# Altium PCB MK2B.PcbDoc
Units mm, origin at the board's own origin, x right, y up, seen from the top; angles counter-clockwise.
Board outline 214 x 214 mm, 2 copper layers (Top Layer, Bottom Layer); 10 components, 2 nets, 24 pads, 0 vias.
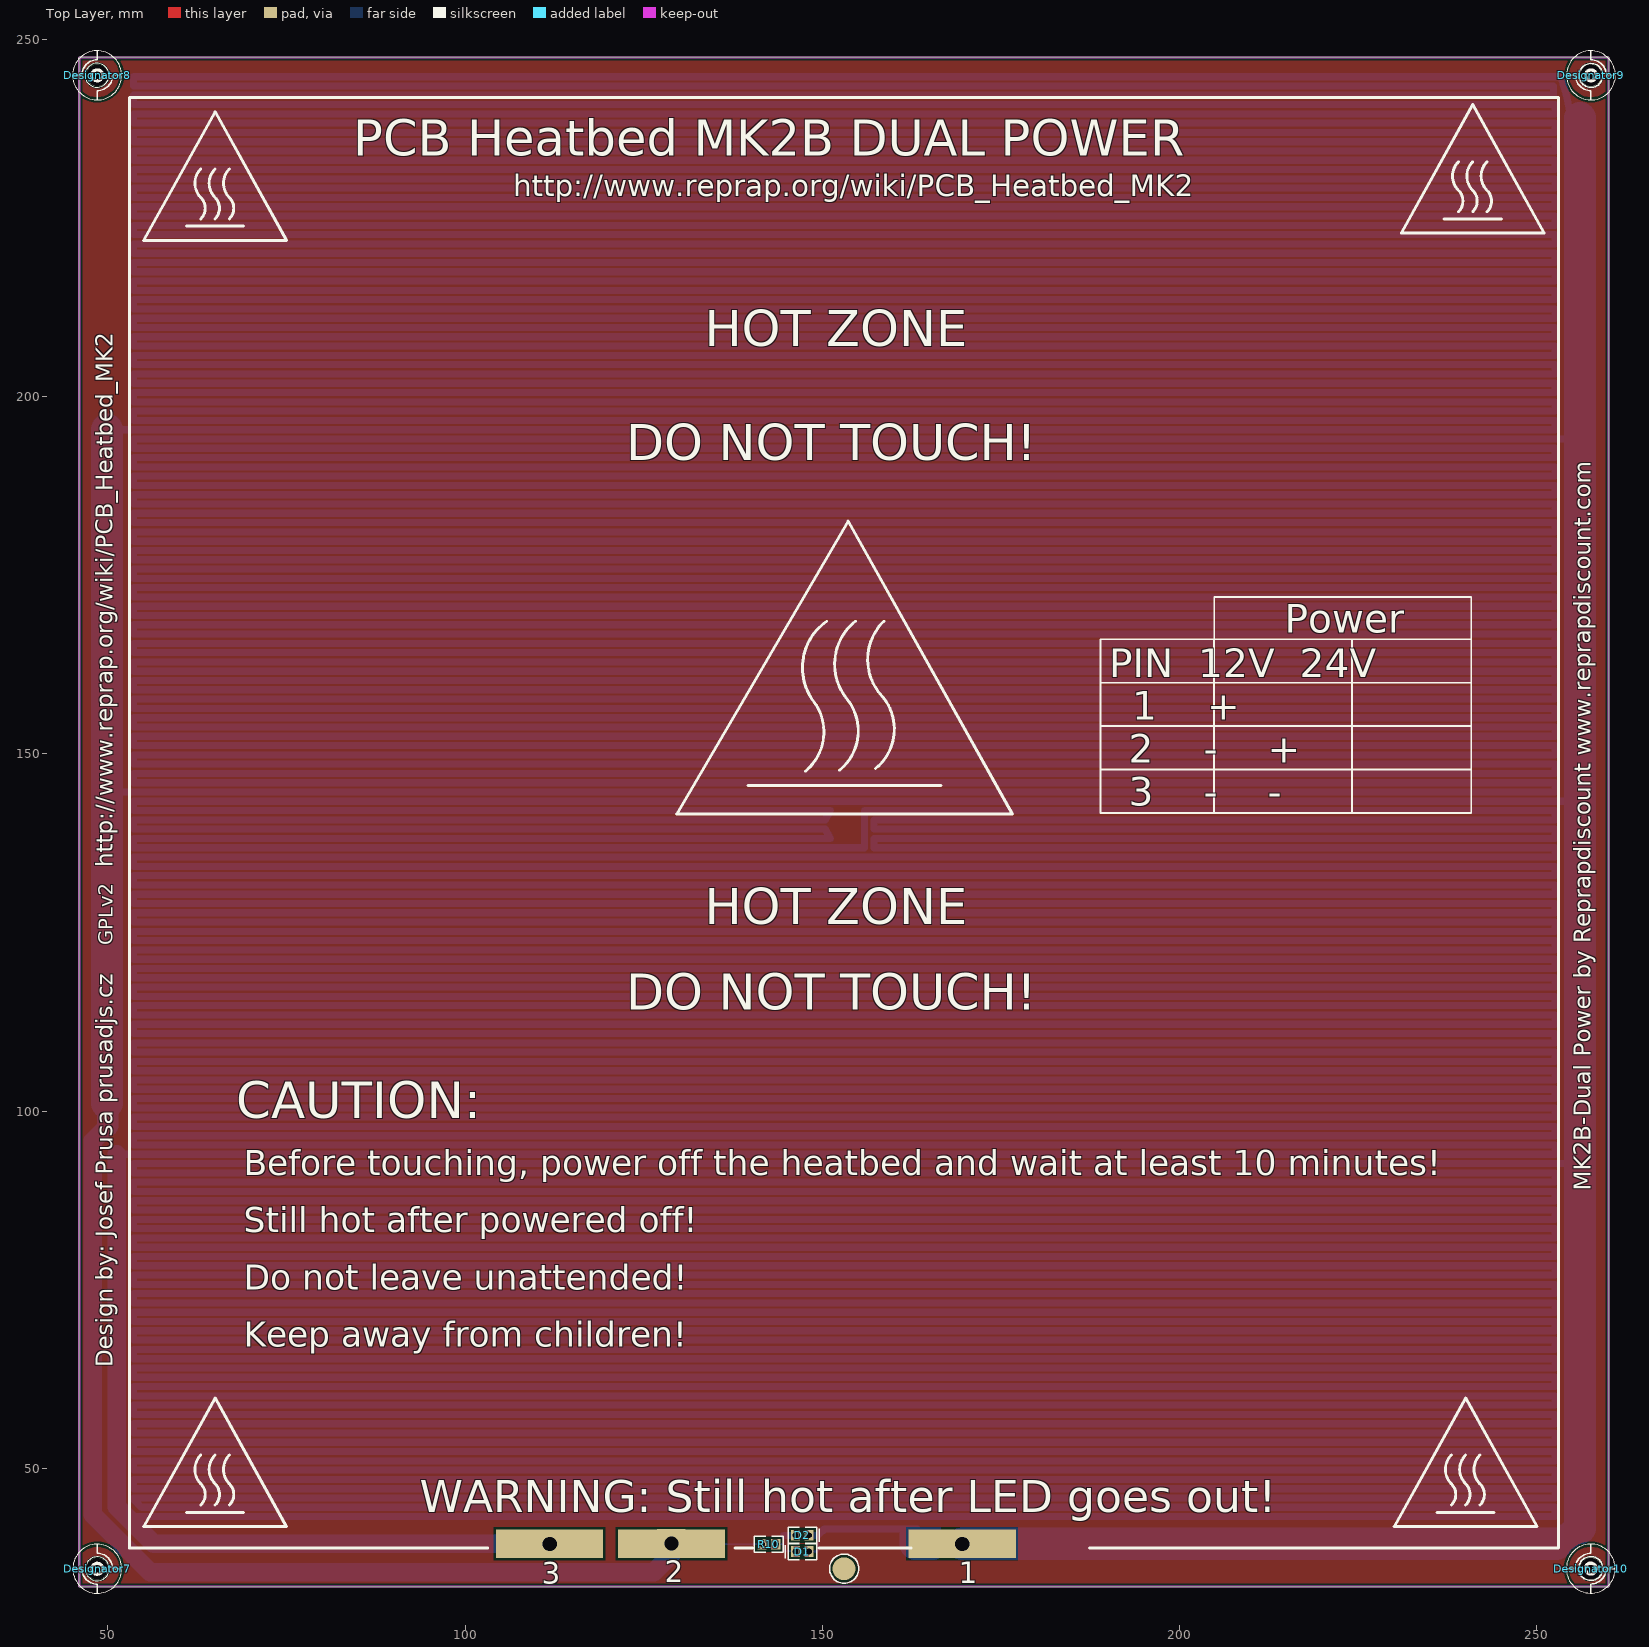
[diagram p0: Top Layer view]
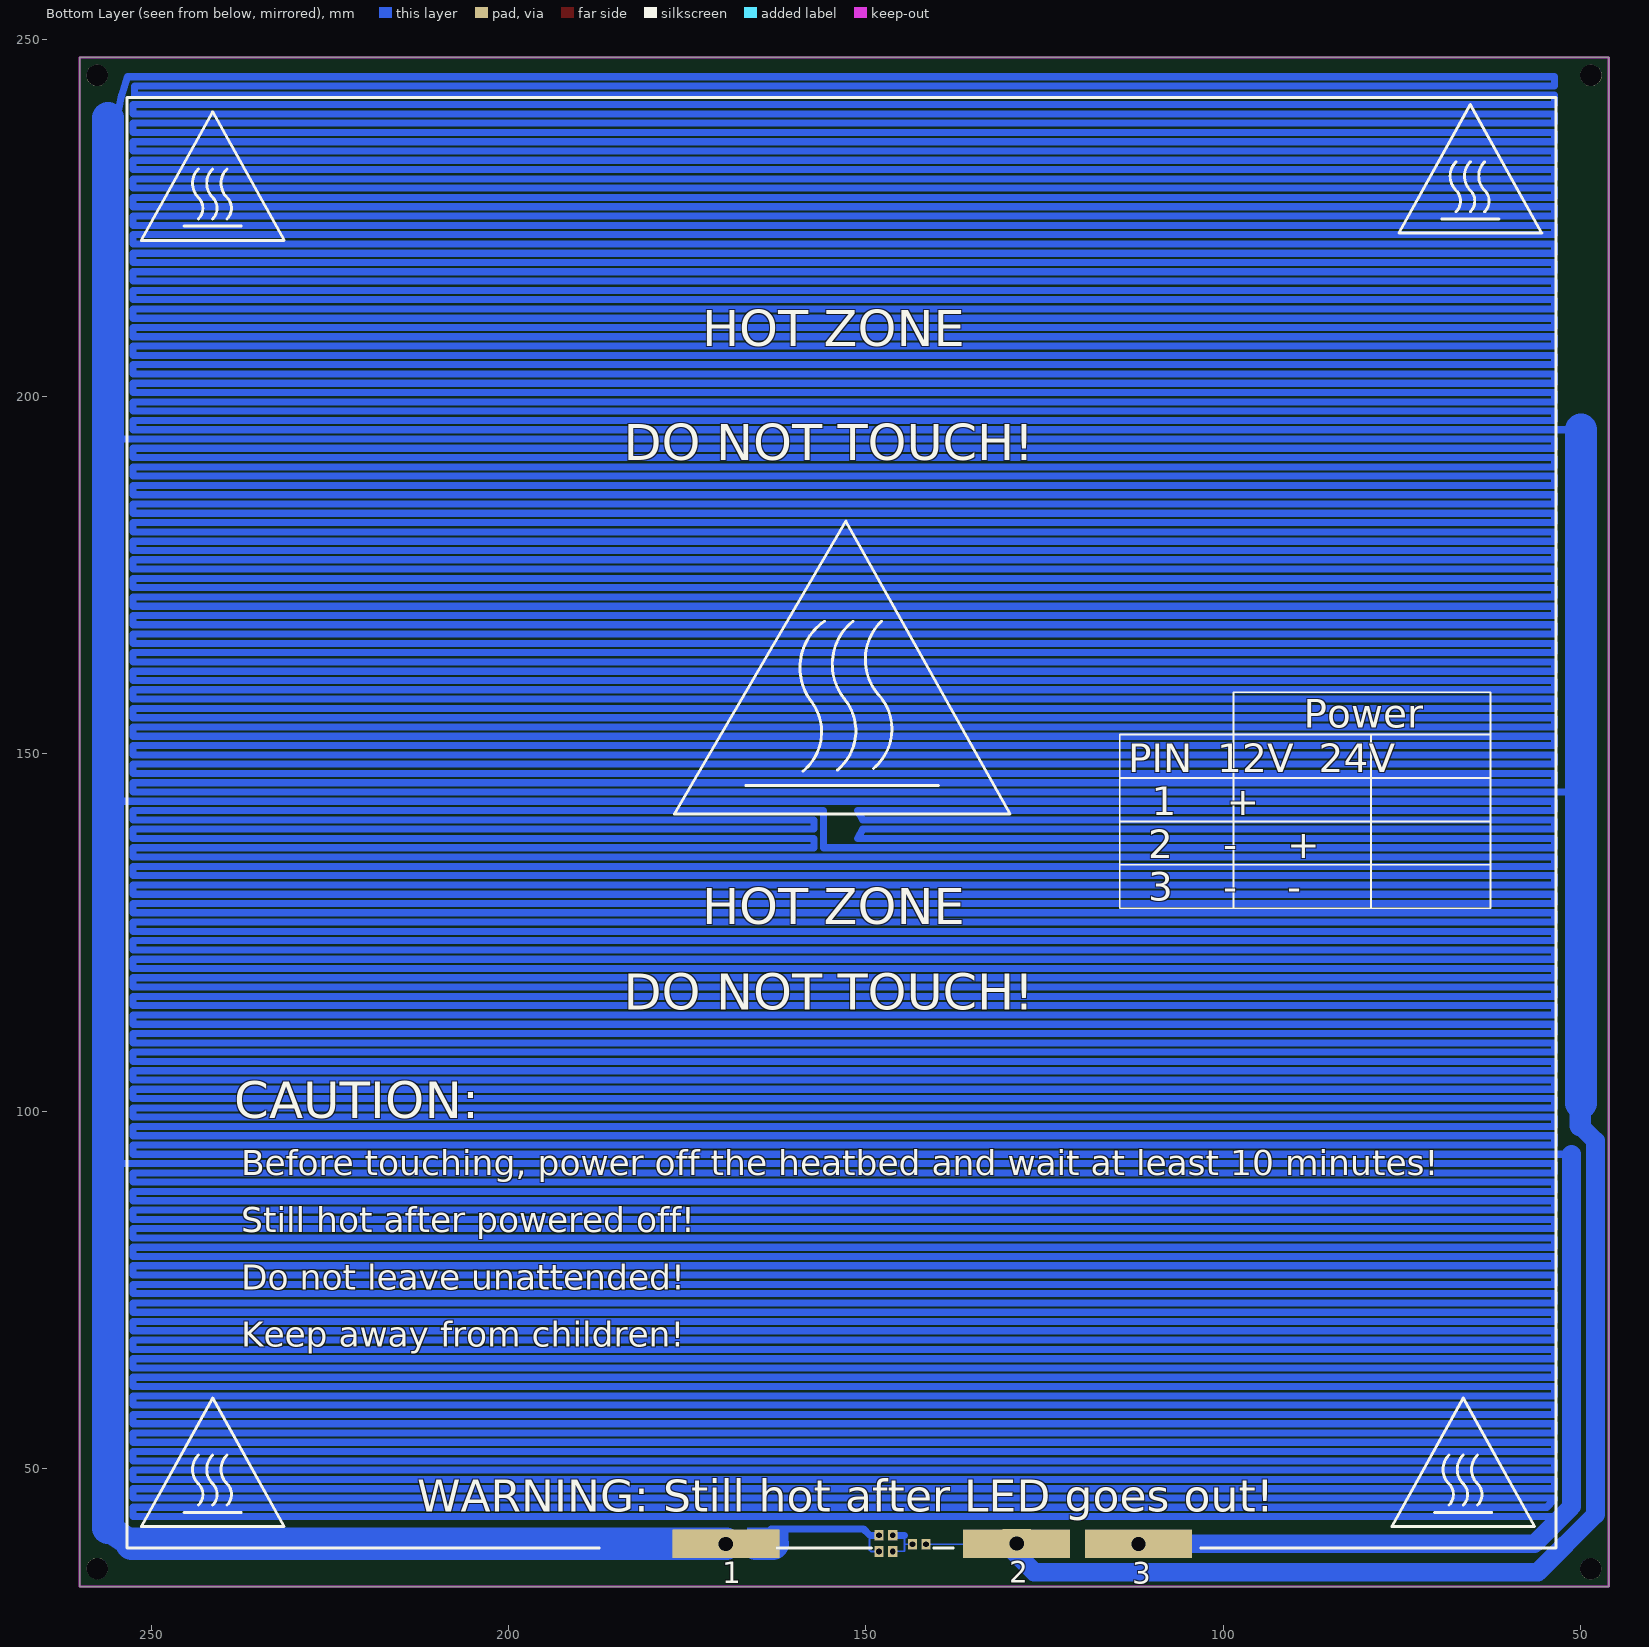
[diagram p1: Bottom Layer view, seen from below]
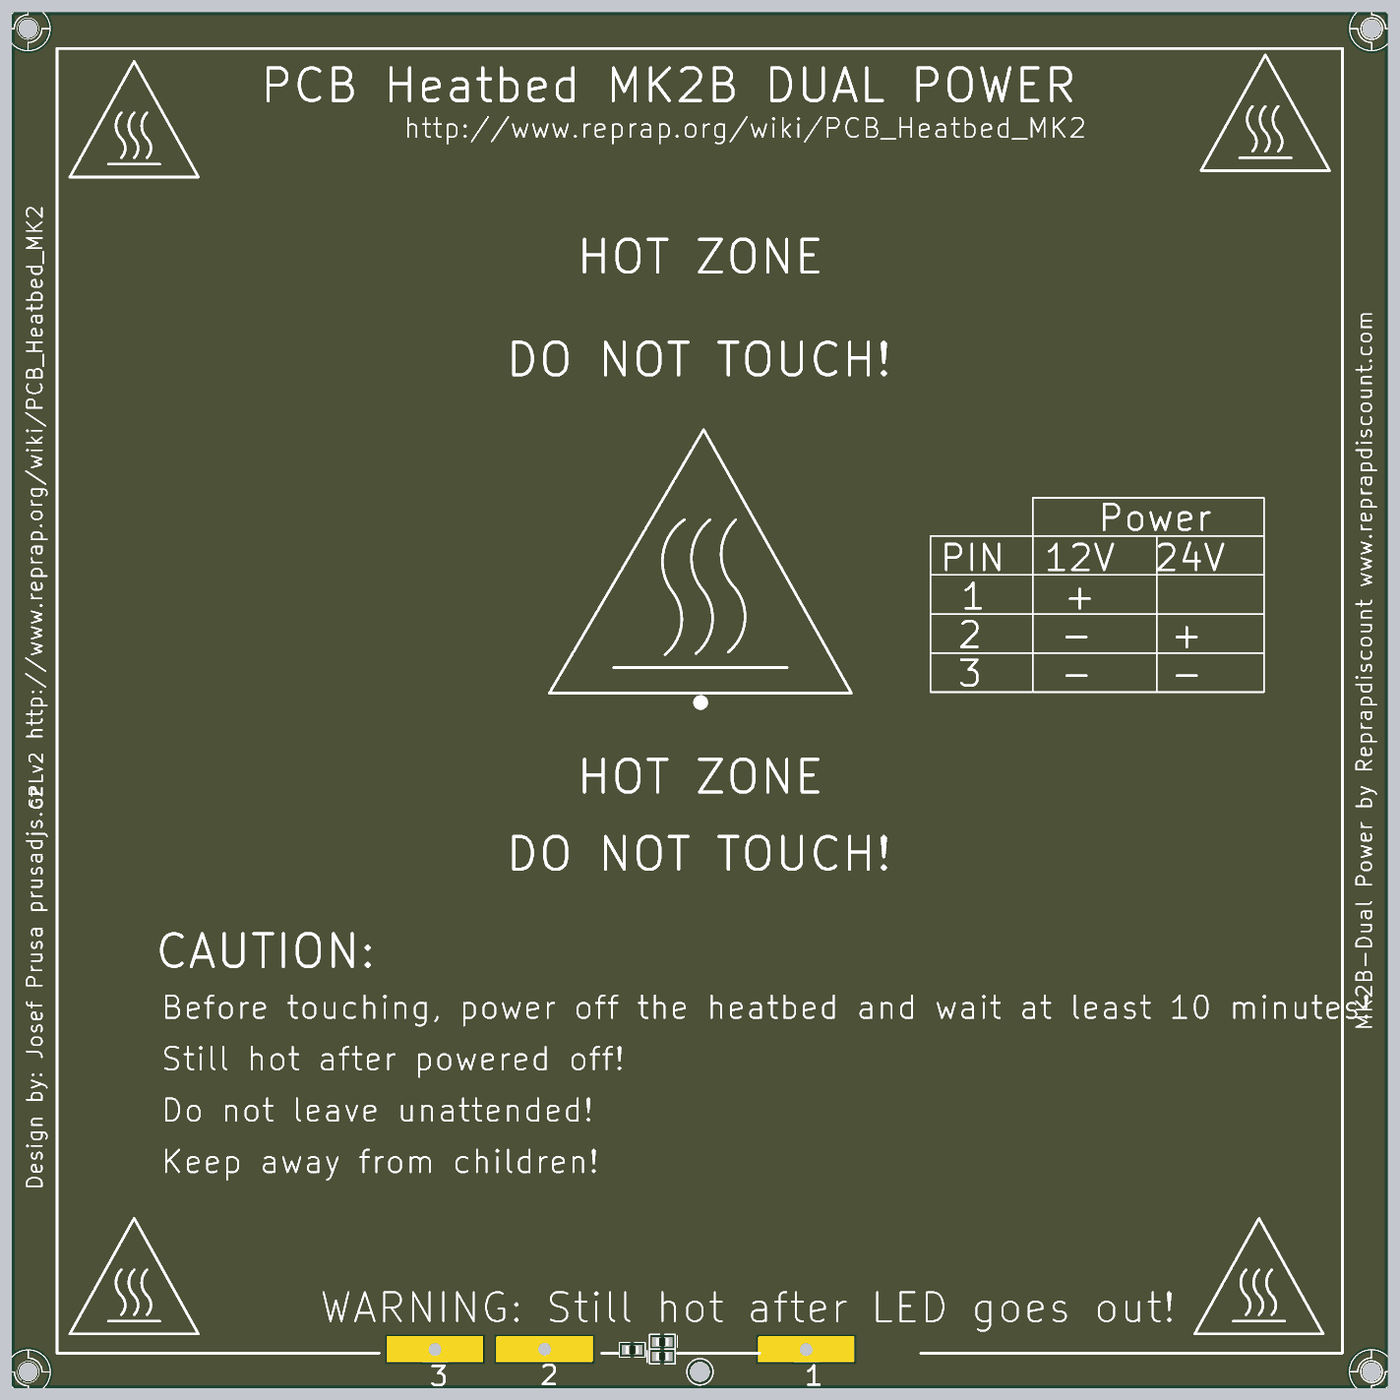
[diagram p2: 3D render of the assembled board from above, using the file's embedded part models]

## Layer stack, top to bottom
Top Layer: signal copper 0.0356
Dielectric: dielectric 0.32, FR-4, Dk 4.8
Bottom Layer: signal copper 0.0356

## Board outline
46.014,33.441 46.014,247.441 260.014,247.441 260.014,33.441

## Design rules (kind name [scope] priority, off if disabled: settings)
Clearance [All] p1: gap=0.3
PolygonConnect [All] p1: connectstyle=Relief reliefconductorwidth=0.254 reliefentries=4 polygonreliefangle="90 Angle"
RoutingVias [All] p1: holewidth=0.711 width=1.27 viastyle="Through Hole" minholewidth=0.711 minwidth=1.27 maxholewidth=0.711 maxwidth=1.27
SilkscreenOverComponentPads [All] p1: minsilkscreentomaskgap=0.254
SolderMaskExpansion [All] p1: expansion=0.102
Width [All] p1: maxlimit=6 minlimit=0.254 preferedwidth=0.254 minimp=50.000000 maximp=50.000000 favimp=50.000000
27 further rules are at their usual default settings.

## Classes and differential pairs
component class "heat bed mk2a": 1 2 3 + - D1 D2 R10

## Components (designator, comment, footprint, x,y, rotation, side; value= is the part's Value field where it differs from the comment)
1 "PORT 1 PIN" "PIN1 4mm hole 2"#1 165.366,39.42 r0 top
2 "PORT 1 PIN" "PIN1 4mm hole 2"#2 134.518,39.472 r0 top locked
3 "PORT 1 PIN" "PIN1 4mm hole 2"#3 111.836,39.42 r0 top
D1 "LED" "Res 2012-0805" 147.193,38.354 r180 top
D2 "LED" "Res 2012-0805" 147.193,40.623 r0 top
Designator7 "Comment" "HOLE HEAT BED" 48.539,35.941 r180 top
Designator8 "Comment" "HOLE HEAT BED" 48.514,244.932 r90 top
Designator9 "Comment" "HOLE HEAT BED" 257.556,244.932 r180 top
Designator10 "Comment" "HOLE HEAT BED" 257.531,35.966 r90 top
R10 "Res3" "Res 2012-0805" 142.5,39.373 r180 top

## Footprints (in the part's own frame and the unit in brackets; to place one, negate y for a bottom-side part, rotate by r counter-clockwise, add the part's x,y. Pads: shape width x height; smd on the part's side, far side on the other; paste and mask are expansions set on the pad)
"HOLE HEAT BED" [mm]
  round 3 hole 3 unplated: ""(0,0)
  silkscreen extent -3.43,-3.43 3.43,3.43
"PIN1 4mm hole 2"#1 [mm]
  rect 4x4 hole 2: 1(4.205,0)
"PIN1 4mm hole 2"#2 [mm]
  rect 4x4 hole 2: 1(-5.639,0)
"PIN1 4mm hole 2"#3 [mm]
  rect 4x4 hole 2: 1(0,0)
"Res 2012-0805" [mm]
  rect 1.3x1.5 smd: 1(-0.95,0) 2(0.95,0)
  silkscreen extent -2,-1.15 2,1.15, body extent -1,-0.63 1,0.63, height 1.5

## Part data
D1 D2: library part "LED SMD OSRAM 0603", "Hyper-Bright Low Current LED OSRAM"
R10: "Resistor"

## Free pads (board coordinates)
  rect 15x4 all layers, no hole: 0(111.836,39.466) 0(128.88,39.466) 0(169.57,39.466)
  rect 1.3x1.5 hole 0.8: 0(141.554,39.37) 0(143.459,39.37) 0(146.228,38.354) 0(146.228,40.615) 0(148.133,38.354) 0(148.133,40.615)
  round 3.2 smd: ""(153.04,35.946)
  round 2.3 on Top Overlay: ""(153.15,140.086)

## Nets (pads, with @x,y where several pads share a name; then routed paths per layer and width w, separated by ;. In a path a pad name is that pad's centre, name@x,y a point inside that pad or via, vN(x,y) a via of type N, cw(c..) or ccw(c..) an arc to the next point about the centre after c; other vN are vias at no path point)
Net1_1: 1.1 2.1 3.1 D1.1 D2.2 pad.0@111.836,39.466 pad.0@128.88,39.466 pad.0@141.554,39.37 pad.0@148.133,38.354 pad.0@148.133,40.615 pad.0@169.57,39.466 R10.2 | length 31901.3
  Bottom Layer w0.254: pad.0@130.302,39.37 pad.0@141.554,39.37 ; pad.0@148.133,38.354 149.301,38.354 149.479,38.532 149.479,40.437 ; 149.301,40.615 149.479,40.437 ; 149.479,40.665 149.479,40.437 ; 163.278,41.529 pad.0@165.366,39.441
  Bottom Layer w1: 49.911,144.641 252.514,144.641 252.514,145.941 53.614,145.941 53.614,147.241 252.514,147.241 252.514,148.541 53.614,148.541 53.614,149.841 252.514,149.841 252.514,151.141 53.614,151.141 53.614,152.441 252.514,152.441 252.514,153.741 53.614,153.741 53.614,155.041 252.514,155.041 252.514,156.341 53.614,156.341 53.614,157.641 252.514,157.641 252.514,158.941 53.614,158.941 53.614,160.241 252.514,160.241 252.514,161.541 53.614,161.541 53.614,162.841 252.514,162.841 252.514,164.141 53.614,164.141 53.614,165.441 252.514,165.441 252.514,166.741 53.614,166.741 53.614,168.041 252.514,168.041 252.514,169.341 53.614,169.341 53.614,170.641 252.514,170.641 252.514,171.941 53.614,171.941 53.614,173.241 252.514,173.241 252.514,174.541 53.614,174.541 53.614,175.841 252.514,175.841 252.514,177.141 53.614,177.141 53.614,178.441 252.514,178.441 252.514,179.741 53.614,179.741 53.614,181.041 252.514,181.041 252.514,182.341 53.614,182.341 53.614,183.641 252.514,183.641 252.514,184.941 53.614,184.941 53.614,186.241 252.514,186.241 252.514,187.541 53.614,187.541 53.614,188.841 252.514,188.841 252.514,190.141 53.614,190.141 53.614,191.441 252.514,191.441 252.514,192.741 53.614,192.741 53.614,194.041 253.814,194.041 ; 49.911,195.341 252.514,195.341 252.514,196.641 53.614,196.641 53.614,197.941 252.514,197.941 252.514,199.241 53.614,199.241 53.614,200.541 252.514,200.541 252.514,201.841 53.614,201.841 53.614,203.141 252.514,203.141 252.514,204.441 53.614,204.441 53.614,205.741 252.514,205.741 252.514,207.041 53.614,207.041 53.614,208.341 252.514,208.341 252.514,209.641 53.614,209.641 53.614,210.941 252.514,210.941 252.514,212.241 53.614,212.241 53.614,213.541 252.514,213.541 252.514,214.841 53.614,214.841 53.614,216.141 252.514,216.141 252.514,217.441 53.614,217.441 53.614,218.741 252.514,218.741 252.514,220.041 53.614,220.041 53.614,221.341 252.514,221.341 252.514,222.641 53.614,222.641 53.614,223.941 252.514,223.941 252.514,225.241 53.614,225.241 53.614,226.541 252.514,226.541 252.514,227.841 53.614,227.841 53.614,229.141 252.514,229.141 252.514,230.441 53.614,230.441 53.614,231.741 252.514,231.741 252.514,233.041 53.614,233.041 53.614,234.341 252.514,234.341 252.514,235.641 53.614,235.641 53.614,236.941 252.514,236.941 252.514,238.241 53.614,238.241 53.614,239.541 252.514,239.541 252.514,240.841 53.614,240.841 53.614,242.141 ; 51.511,93.941 252.514,93.941 252.514,95.241 53.614,95.241 53.614,96.541 252.514,96.541 252.514,97.841 53.614,97.841 53.614,99.141 252.514,99.141 252.514,100.441 53.614,100.441 53.614,101.741 252.514,101.741 252.514,103.041 53.614,103.041 53.614,104.341 252.514,104.341 252.514,105.641 53.614,105.641 53.614,106.941 252.514,106.941 252.514,108.241 53.614,108.241 53.614,109.541 252.514,109.541 252.514,110.841 53.614,110.841 53.614,112.141 252.514,112.141 252.514,113.441 53.614,113.441 53.614,114.741 252.514,114.741 252.514,116.041 53.614,116.041 53.614,117.341 252.514,117.341 252.514,118.641 53.614,118.641 53.614,119.941 252.514,119.941 252.514,121.241 53.614,121.241 53.614,122.541 252.514,122.541 252.514,123.841 53.614,123.841 53.614,125.141 252.514,125.141 252.514,126.441 53.614,126.441 53.614,127.741 252.514,127.741 252.514,129.041 53.614,129.041 53.614,130.341 252.514,130.341 252.514,131.641 53.614,131.641 53.614,132.941 252.514,132.941 252.514,134.241 53.614,134.241 53.614,135.541 252.514,135.541 252.514,136.841 157.214,136.841 157.214,138.141 252.514,138.141 252.514,139.441 157.214,139.441 157.214,140.741 252.514,140.741 252.514,142.041 155.914,142.041 155.914,136.841 53.614,136.841 53.614,138.141 151.114,138.141 150.414,139.441 53.614,139.441 53.614,140.741 150.414,140.741 151.114,142.041 53.614,142.041 53.614,143.341 253.814,143.341 ; 52.695,43.241 252.514,43.241 252.514,44.541 54.697,44.541 53.614,45.624 53.614,45.841 252.514,45.841 252.514,47.141 53.614,47.141 53.614,48.441 252.514,48.441 252.514,49.741 53.614,49.741 53.614,51.041 252.514,51.041 252.514,52.341 53.614,52.341 53.614,53.641 252.514,53.641 252.514,54.941 53.614,54.941 53.614,56.241 252.514,56.241 252.514,57.541 53.614,57.541 53.614,58.841 252.514,58.841 252.514,60.141 53.614,60.141 53.614,61.441 252.514,61.441 252.514,62.741 53.614,62.741 53.614,64.041 252.514,64.041 252.514,65.341 53.614,65.341 53.614,66.641 252.514,66.641 252.514,67.941 53.614,67.941 53.614,69.241 252.514,69.241 252.514,70.541 53.614,70.541 53.614,71.841 252.514,71.841 252.514,73.141 53.614,73.141 53.614,74.441 252.514,74.441 252.514,75.741 53.614,75.741 53.614,77.041 252.514,77.041 252.514,78.341 53.614,78.341 53.614,79.641 252.514,79.641 252.514,80.941 53.614,80.941 53.614,82.241 252.514,82.241 252.514,83.541 53.614,83.541 53.614,84.841 252.514,84.841 252.514,86.141 53.614,86.141 53.614,87.441 252.514,87.441 252.514,88.741 53.614,88.741 53.614,90.041 252.514,90.041 252.514,91.341 53.614,91.341 53.614,92.641 253.814,92.641 ; 53.664,242.181 252.254,242.161 ; pad.0@148.133,40.615 149.301,40.615 ; 149.479,40.665 150.343,41.529 163.278,41.529 ; 252.314,242.141 252.314,243.461 53.594,243.461 53.594,244.731 253.234,244.731 ; 253.321,244.748 254.114,242.141 254.814,238.541
  Bottom Layer w2.6: 49.987,97.917 47.879,95.809 47.879,43.536 55.956,35.458 126.39,35.458 pad.0@130.302,39.37 ; 51.232,44.704 51.232,93.955 ; 51.247,44.613 56.419,39.441 3.1@110.261,39.441
  Bottom Layer w3: 49.987,97.917 49.987,100.508
  Bottom Layer w3.81: 252.714,39.441 256.014,41.641
  Bottom Layer w4.5: 49.911,101.117 49.911,144.641 49.911,195.341 ; pad.0@163.014,39.441 pad.0@165.366,39.441 ; pad.0@169.57,39.441 252.714,39.441 ; 256.014,41.641 256.014,238.941
NetD1_2: D1.2 D2.1 pad.0@143.459,39.37 pad.0@146.228,38.354 pad.0@146.228,40.615 R10.1 | length 6.5
  Bottom Layer w0.254: pad.0@143.459,39.37 144.526,39.37 ; 144.577,40.615 144.577,38.405 pad.0@146.177,38.405
  Bottom Layer w1: 144.577,40.615 pad.0@146.228,40.615
pads on no net: Designator7. Designator8. Designator9. Designator10.

## Polygon pours and split planes (outlines as drawn)
no net on Top Layer "Bottom Layer-No Net" (solid, pour order 1000): 260.014,247.193 260.014,33.441 46.228,33.441 46.228,247.441

## Keep-outs
Keep-Out Layer:
  the board outline again, w0.305

## Other copper
Bottom Layer:
  rectangle net Net1_1: 160.782,39.37 166.599,41.707

## Silkscreen, mask and mechanical layers (free items; w line width, h text height)
Top Overlay:
  circle w0.2: c257.531,35.978 r1.671
  circle w0.1: c48.505,244.94 r1.671
  circle w0.1: c48.534,35.935 r1.671
  circle w0.2: c257.555,244.922 r1.671
  circle w0.2: c153.05,35.956 r2.044
  lines w0.2: 144.831,37.44 144.831,39.218 ; 149.53,39.751 149.53,41.529
  lines w0.254: 188.925,147.784 240.792,147.784 ; 188.925,153.861 240.792,153.861 ; 188.925,159.937 240.792,159.937 ; 204.826,141.707 204.826,166.014 ; 204.851,166.065 204.851,171.933 240.792,171.933 240.792,166.04 ; 224.104,141.707 224.104,166.014 ; 188.925,141.707 240.792,141.707 240.792,166.014 188.925,166.014 188.925,141.707
  lines w0.4: 53.014,38.841 103.175,38.841 ; 137.77,38.837 140.233,38.837 ; 149.53,38.837 162.382,38.837 ; 187.401,38.841 253.014,38.841
  lines w0.406: 53.014,38.841 53.014,241.841 253.014,241.841 253.014,38.841 ; 61.014,43.841 69.014,43.841 ; 61.014,223.841 69.014,223.841 ; 63.014,44.841 ccw(c61.514,46.341) 63.014,47.841 cw(c65.014,49.841) 63.014,51.841 ; 63.014,224.841 ccw(c61.514,226.341) 63.014,227.841 cw(c65.014,229.841) 63.014,231.841 ; 65.014,44.841 ccw(c63.514,46.341) 65.014,47.841 cw(c67.014,49.841) 65.014,51.841 ; 65.014,224.841 ccw(c63.514,226.341) 65.014,227.841 cw(c67.014,229.841) 65.014,231.841 ; 67.014,44.841 ccw(c65.514,46.341) 67.014,47.841 cw(c69.014,49.841) 67.014,51.841 ; 67.014,224.841 ccw(c65.514,226.341) 67.014,227.841 cw(c69.014,229.841) 67.014,231.841 ; 139.614,145.541 166.614,145.541 ; 147.614,147.541 ccw(c143.114,153.041) 148.614,157.541 cw(c155.114,162.041) 150.614,168.541 ; 152.414,147.691 ccw(c147.914,153.191) 153.414,157.691 cw(c159.439,162.516) 154.614,168.541 ; 157.464,147.941 ccw(c152.964,153.441) 158.464,157.941 cw(c163.839,163.166) 158.614,168.541 ; 236.014,43.841 244.014,43.841 ; 237.014,224.841 245.014,224.841 ; 238.014,44.841 ccw(c236.514,46.341) 238.014,47.841 cw(c240.014,49.841) 238.014,51.841 ; 239.014,225.841 ccw(c237.514,227.341) 239.014,228.841 cw(c241.014,230.841) 239.014,232.841 ; 240.014,44.841 ccw(c238.514,46.341) 240.014,47.841 cw(c242.014,49.841) 240.014,51.841 ; 241.014,225.841 ccw(c239.514,227.341) 241.014,228.841 cw(c243.014,230.841) 241.014,232.841 ; 242.014,44.841 ccw(c240.514,46.341) 242.014,47.841 cw(c244.014,49.841) 242.014,51.841 ; 243.014,225.841 ccw(c241.514,227.341) 243.014,228.841 cw(c245.014,230.841) 243.014,232.841 ; 55.014,41.841 65.014,59.841 75.014,41.841 55.014,41.841 ; 55.014,221.841 65.014,239.841 75.014,221.841 55.014,221.841 ; 129.614,141.541 153.614,182.541 176.614,141.541 129.614,141.541 ; 230.014,41.841 240.014,59.841 250.014,41.841 230.014,41.841 ; 231.014,222.841 241.014,240.841 251.014,222.841 231.014,222.841
  text "PCB Heatbed MK2B DUAL POWER" at 84.328,233.705 h5.08
  text "http://www.reprap.org/wiki/PCB_Heatbed_MK2" at 106.767,228.041 h3
  text "HOT ZONE" at 133.547,207.041 h5.08
  text "DO NOT TOUCH!" at 122.544,191.041 h5.08
  text "Power" at 214.709,166.948 h4
  text "PIN  12V  24V" at 190.148,160.725 h4
  text "1    +" at 193.397,154.725 h4
  text "2    -    +" at 192.897,148.725 h4
  text "3    -    -" at 192.897,142.725 h4
  text "http://www.reprap.org/wiki/PCB_Heatbed_MK2" at 50.664,134.078 h2.35 r90
  text "HOT ZONE" at 133.547,126.141 h5.08
  text "GPLv2" at 50.698,123.19 h2 r90
  text "DO NOT TOUCH!" at 122.544,114.141 h5.08
  text "CAUTION:" at 68,99 h5.1
  text "Before touching, power off the heatbed and wait at least 10 minutes!" at 69,91 h3.5
  text "MK2B-Dual Power by Reprapdiscount www.reprapdiscount.com" at 257.505,88.875 h2.35 r90
  text "Still hot after powered off!" at 69,83 h3.5
  text "Do not leave unattended!" at 69,75 h3.5
  text "Keep away from children!" at 69,67 h3.5
  text "Design by: Josef Prusa prusadjs.cz" at 50.664,64.11 h2.35 r90
  text "WARNING: Still hot after LED goes out!" at 93.648,43.832 h4.5
Bottom Overlay:
  lines w0.254: 62.586,134.449 114.452,134.449 ; 62.586,140.525 114.452,140.525 ; 62.586,146.602 114.452,146.602 ; 62.586,152.705 62.586,158.598 98.527,158.598 98.527,152.73 ; 79.273,128.372 79.273,152.679 ; 98.552,128.372 98.552,152.679 ; 187.223,38.786 187.279,38.841 ; 62.586,128.372 62.586,152.679 114.452,152.679 114.452,128.372 62.586,128.372
  lines w0.4: 53.386,38.841 103.124,38.841 ; 137.744,38.837 140.487,38.837 ; 149.174,38.841 162.382,38.841 ; 187.279,38.841 253.386,38.841
  lines w0.406: 53.386,38.841 53.386,241.841 253.386,241.841 253.386,38.841 ; 61.386,224.841 69.386,224.841 ; 62.386,43.841 70.386,43.841 ; 63.386,225.841 cw(c64.886,227.341) 63.386,228.841 ccw(c61.386,230.841) 63.386,232.841 ; 64.386,44.841 cw(c65.886,46.341) 64.386,47.841 ccw(c62.386,49.841) 64.386,51.841 ; 65.386,225.841 cw(c66.886,227.341) 65.386,228.841 ccw(c63.386,230.841) 65.386,232.841 ; 66.386,44.841 cw(c67.886,46.341) 66.386,47.841 ccw(c64.386,49.841) 66.386,51.841 ; 67.386,225.841 cw(c68.886,227.341) 67.386,228.841 ccw(c65.386,230.841) 67.386,232.841 ; 68.386,44.841 cw(c69.886,46.341) 68.386,47.841 ccw(c66.386,49.841) 68.386,51.841 ; 139.786,145.541 166.786,145.541 ; 147.786,168.541 cw(c142.561,163.166) 147.936,157.941 ccw(c153.436,153.441) 148.936,147.941 ; 151.786,168.541 cw(c146.961,162.516) 152.986,157.691 ccw(c158.486,153.191) 153.986,147.691 ; 155.786,168.541 cw(c151.286,162.041) 157.786,157.541 ccw(c163.286,153.041) 158.786,147.541 ; 237.386,43.841 245.386,43.841 ; 237.386,223.841 245.386,223.841 ; 239.386,44.841 cw(c240.886,46.341) 239.386,47.841 ccw(c237.386,49.841) 239.386,51.841 ; 239.386,224.841 cw(c240.886,226.341) 239.386,227.841 ccw(c237.386,229.841) 239.386,231.841 ; 241.386,44.841 cw(c242.886,46.341) 241.386,47.841 ccw(c239.386,49.841) 241.386,51.841 ; 241.386,224.841 cw(c242.886,226.341) 241.386,227.841 ccw(c239.386,229.841) 241.386,231.841 ; 243.386,44.841 cw(c244.886,46.341) 243.386,47.841 ccw(c241.386,49.841) 243.386,51.841 ; 243.386,224.841 cw(c244.886,226.341) 243.386,227.841 ccw(c241.386,229.841) 243.386,231.841 ; 55.386,222.841 75.386,222.841 65.386,240.841 55.386,222.841 ; 56.386,41.841 76.386,41.841 66.386,59.841 56.386,41.841 ; 129.786,141.541 176.786,141.541 152.786,182.541 129.786,141.541 ; 231.386,41.841 251.386,41.841 241.386,59.841 231.386,41.841 ; 231.386,221.841 251.386,221.841 241.386,239.841 231.386,221.841
  text "HOT ZONE" at 172.853,207.041 h5.08
  text "DO NOT TOUCH!" at 183.856,191.041 h5.08
  text "Power" at 88.668,153.613 h4
  text "PIN  12V  24V" at 113.23,147.39 h4
  text "1    +" at 109.981,141.39 h4
  text "2    -    +" at 110.481,135.39 h4
  text "3    -    -" at 110.481,129.39 h4
  text "HOT ZONE" at 172.853,126.141 h5.08
  text "DO NOT TOUCH!" at 183.856,114.141 h5.08
  text "CAUTION:" at 238.386,99 h5.1
  text "Before touching, power off the heatbed and wait at least 10 minutes!" at 237.386,91 h3.5
  text "Still hot after powered off!" at 237.386,83 h3.5
  text "Do not leave unattended!" at 237.386,75 h3.5
  text "Keep away from children!" at 237.386,67 h3.5
  text "WARNING: Still hot after LED goes out!" at 212.752,43.891 h4.5
  text "2" at 129.921,34.011 h3
  text "1" at 170.078,33.934 h3
  text "3" at 112.725,33.858 h3

## Text inside footprints (layer, text, board x,y; h text height)
Designator7: Mechanical 2 "3,0" at 49.809,39.751 h1.27 r180
Designator8: Mechanical 2 "3,0" at 52.324,243.662 h1.27 r90
Designator9: Mechanical 2 "3,0" at 258.826,248.742 h1.27 r180
Designator10: Mechanical 2 "3,0" at 261.341,34.696 h1.27 r90